# EAGLE board motherboard_alt (EAGLE 8.5.0)
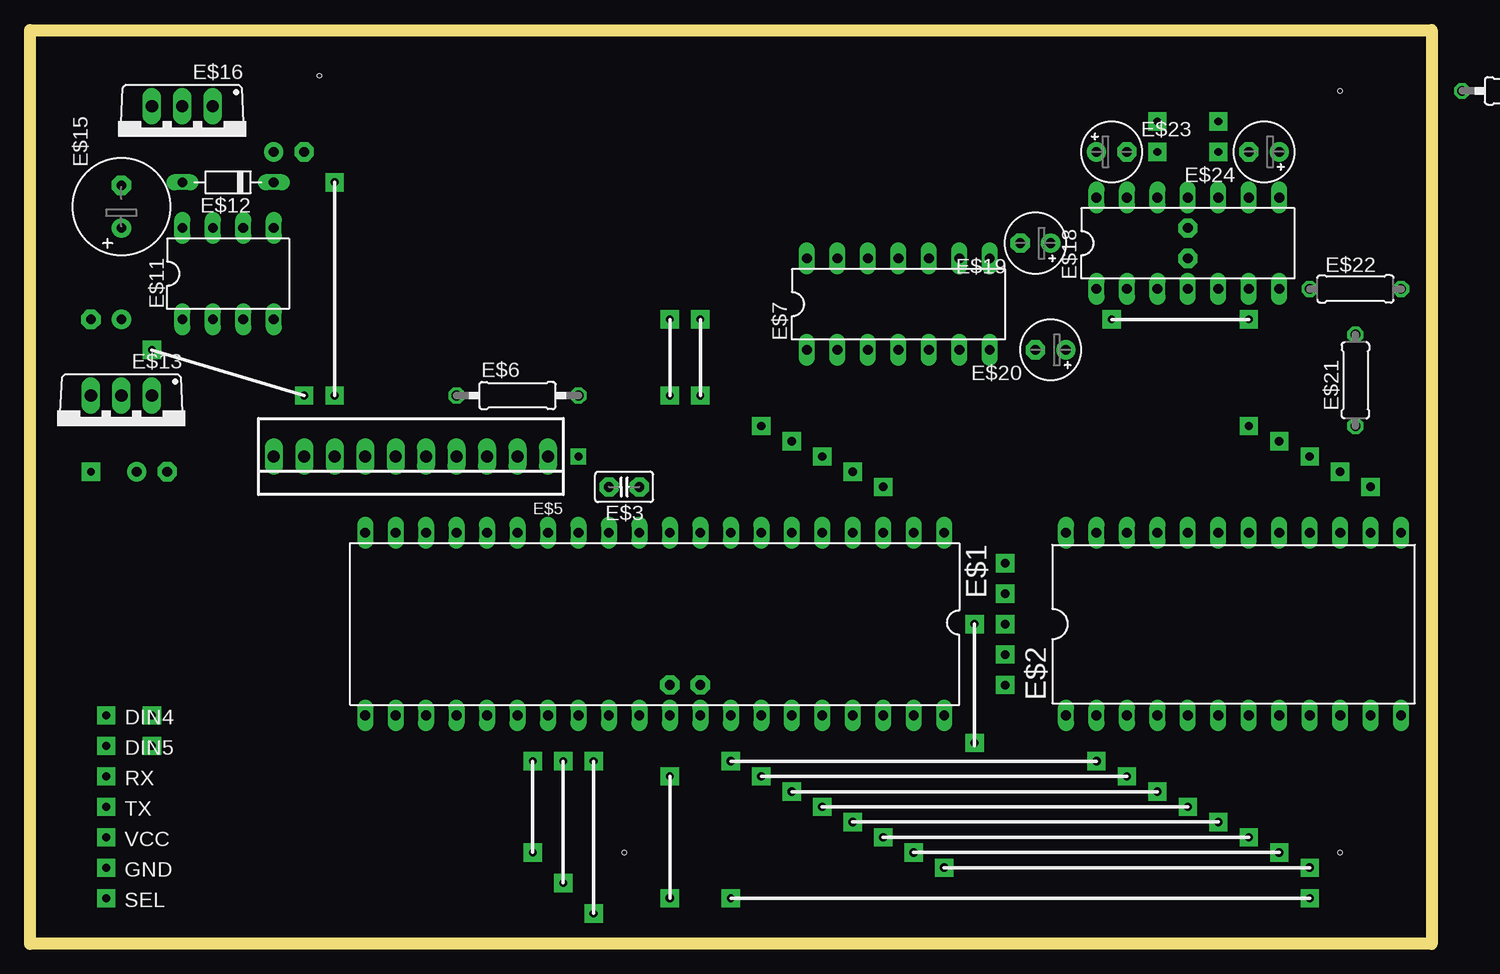
[diagram p0: board, top side]
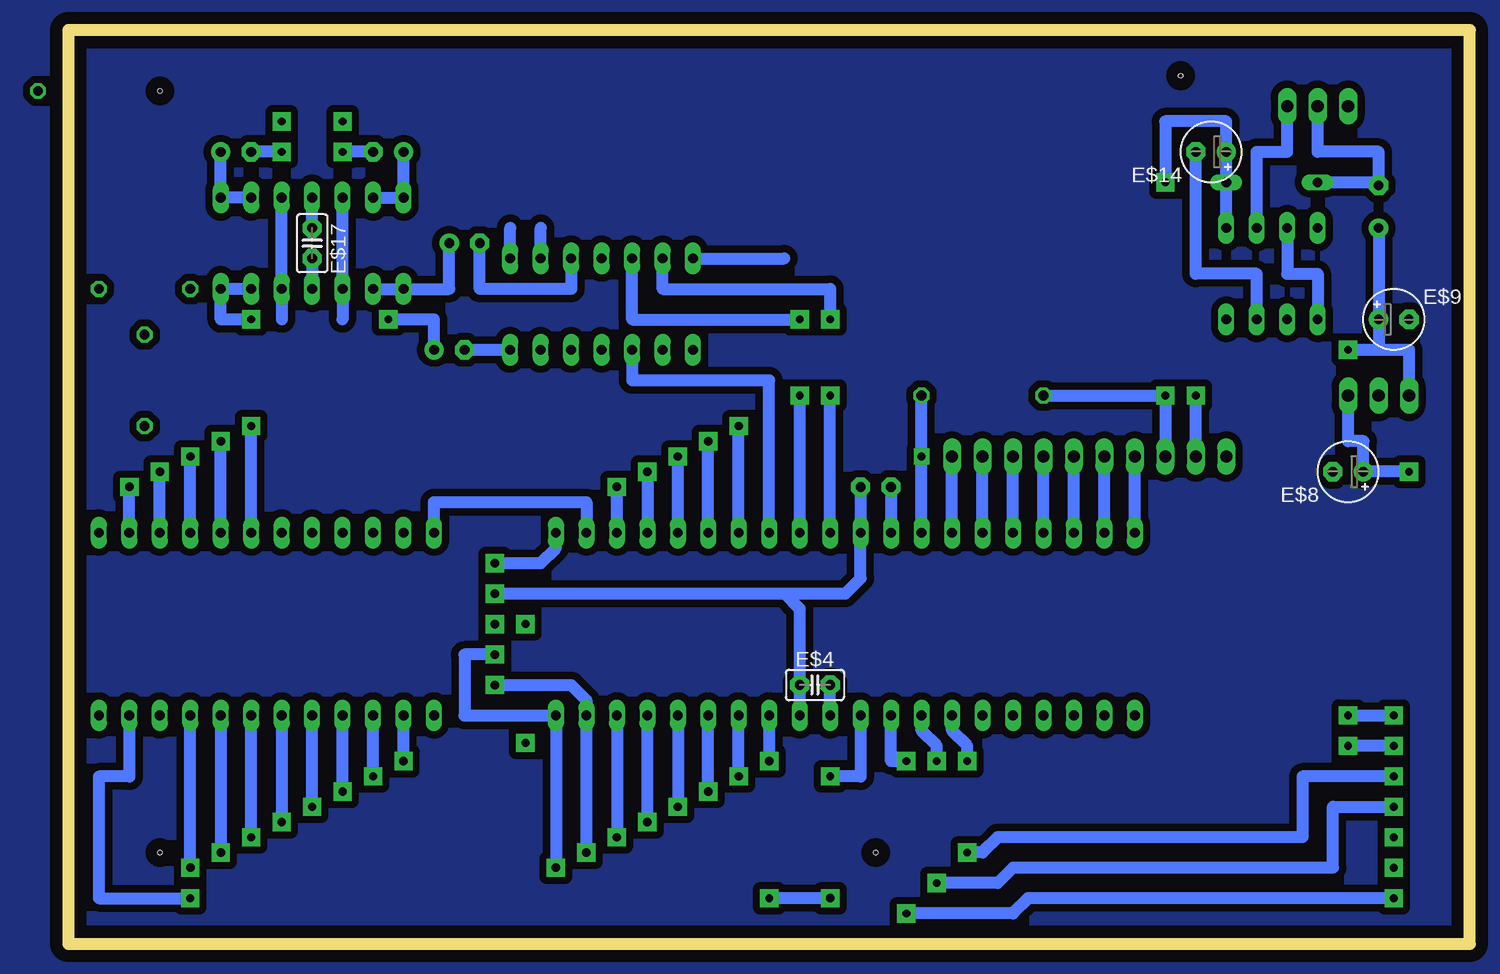
[diagram p1: board, bottom side, seen from below]

Size 116.84 x 76.2 mm. Coordinates in mm from the lower left corner, seen from the top.
Outline: 116.84,0 0,0 0,76.2 116.84,76.2 116.84,0
Copper layers (1*16): Top 0.035mm / dielectric 1.5mm / Bottom 0.035mm
Design rules "default": minimum track width 6mil, minimum drill 0.35mm, track to track 6mil, track to pad 6mil, pad to pad 6mil, via to via 6mil, smd to smd 6mil, copper to edge 40mil, drill to drill 6mil, minimum pad ring 10mil, minimum via ring 8mil, stop-mask expansion 4mil, vias tented up to drill 0mil, thermal gap 10mil
Holes 0.35 mm at 109.22,7.62 49.53,7.62 109.22,71.12 24.13,72.39

## Footprints (pad centres in the part's own frame; a part is rotated, then mirrored left to right if it is on the bottom)
DIL40 = drill 0.813 long: 1 -24.13,-7.62; 2 -21.59,-7.62; 3 -19.05,-7.62; 4 -16.51,-7.62; 5 -13.97,-7.62; 6 -11.43,-7.62; 7 -8.89,-7.62; 8 -6.35,-7.62; 9 -3.81,-7.62; 10 -1.27,-7.62; 11 1.27,-7.62; 12 3.81,-7.62; 13 6.35,-7.62; 14 8.89,-7.62; 15 11.43,-7.62; 16 13.97,-7.62; 17 16.51,-7.62; 18 19.05,-7.62; 19 21.59,-7.62; 20 24.13,-7.62; 21 24.13,7.62; 22 21.59,7.62; 23 19.05,7.62; 24 16.51,7.62; 25 13.97,7.62; 26 11.43,7.62; 27 8.89,7.62; 28 6.35,7.62; 29 3.81,7.62; 30 1.27,7.62; 31 -1.27,7.62; 32 -3.81,7.62; 33 -6.35,7.62; 34 -8.89,7.62; 35 -11.43,7.62; 36 -13.97,7.62; 37 -16.51,7.62; 38 -19.05,7.62; 39 -21.59,7.62; 40 -24.13,7.62
DIL24-6 = drill 0.813 long: 1 -13.97,-7.62; 2 -11.43,-7.62; 3 -8.89,-7.62; 4 -6.35,-7.62; 5 -3.81,-7.62; 6 -1.27,-7.62; 7 1.27,-7.62; 8 3.81,-7.62; 9 6.35,-7.62; 10 8.89,-7.62; 11 11.43,-7.62; 12 13.97,-7.62; 13 13.97,7.62; 14 11.43,7.62; 15 8.89,7.62; 16 6.35,7.62; 17 3.81,7.62; 18 1.27,7.62; 19 -1.27,7.62; 20 -3.81,7.62; 21 -6.35,7.62; 22 -8.89,7.62; 23 -11.43,7.62; 24 -13.97,7.62
C2.5-2 = drill 0.813 pad 1.6 octagon: 1 -1.27,0; 2 1.27,0
22-23-2101 = drill 1 long: 1 -11.43,0; 2 -8.89,0; 3 -6.35,0; 4 -3.81,0; 5 -1.27,0; 6 1.27,0; 7 3.81,0; 8 6.35,0; 9 8.89,0; 10 11.43,0
0207/10 = drill 0.813 octagon: 1 -5.08,0; 2 5.08,0
DIL14 = drill 0.813 long: 1 -7.62,-3.81; 2 -5.08,-3.81; 3 -2.54,-3.81; 4 0,-3.81; 5 2.54,-3.81; 6 5.08,-3.81; 7 7.62,-3.81; 8 7.62,3.81; 9 5.08,3.81; 10 2.54,3.81; 11 0,3.81; 12 -2.54,3.81; 13 -5.08,3.81; 14 -7.62,3.81
E2,5-5 = drill 0.813 pad 1.6: + -1.27,0 | drill 0.813 pad 1.6 octagon: - 1.27,0
DIL08 = drill 0.813 long: 1 -3.81,-3.81; 2 -1.27,-3.81; 3 1.27,-3.81; 4 3.81,-3.81; 5 3.81,3.81; 6 1.27,3.81; 7 -1.27,3.81; 8 -3.81,3.81
D-7.5 = drill 0.813 long: A 3.81,0; C -3.81,0
TO220V = drill 1.016 long: 1 -2.54,-2.54; 2 0,-2.54; 3 2.54,-2.54
E3,5-8 = drill 0.813 pad 1.6: + -1.778,0 | drill 0.813 pad 1.6 octagon: - 1.778,0
0207/7 = drill 0.813 octagon: 1 -3.81,0; 2 3.81,0

## Placement (x,y rotation side)
E$1  [DIL40]  52.07,26.67 180 top
E$2  [DIL24-6]  100.33,26.67 0 top
E$3  [C2.5-2]  49.53,38.1 180 top
E$4  [C2.5-2]  54.61,21.59 0 bottom
E$5  [22-23-2101]  31.75,40.64 180 top
E$6  [0207/10]  40.64,45.72 0 top
E$7  [DIL14]  72.39,53.34 0 top
E$8  [E2,5-5]  10.16,39.37 180 bottom
E$9  [E2,5-5]  6.35,52.07 0 bottom
E$10  [0207/10]  124.46,71.12 180 top
E$11  [DIL08]  16.51,55.88 0 top
E$12  [D-7.5]  16.51,63.5 180 top
E$13  [TO220V]  7.62,43.18 180 top
E$14  [E2,5-5]  21.59,66.04 180 bottom
E$15  [E3,5-8]  7.62,61.47 90 top
E$16  [TO220V]  12.7,67.31 180 top
E$17  [C2.5-2]  96.52,58.42 270 bottom
E$18  [DIL14]  96.52,58.42 0 top
E$19  [E2,5-5]  83.82,58.42 180 top
E$20  [E2,5-5]  85.09,49.53 180 top
E$21  [0207/7]  110.49,46.99 90 top
E$22  [0207/7]  110.49,54.61 0 top
E$23  [E2,5-5]  90.17,66.04 0 top
E$24  [E2,5-5]  102.87,66.04 180 top

## Library data of the parts
E$1 E$2 = ic-package
E$3 E$4 E$17 = capacitor-wima
E$5 = con-molex
E$6 E$10 E$21 E$22 = BeagleBone_Black_Wireless
E$7 E$11 E$18 = 40xx
E$8 E$9 E$14 E$15 E$19 E$20 E$23 E$24 = BeagleBone_Blue_R3
E$12 = diode
E$13 E$16 = transistor-pnp

## Nets
S$1: E$2.2
S$2: E$2.3
S$3: E$2.4
S$4: E$2.5
S$5: E$2.6
S$6: E$2.7
S$7: E$2.8
S$8: E$2.9
S$9: E$1.33
S$10: E$1.34
S$11: E$1.35
S$12: E$1.36
S$13: E$1.37
S$14: E$1.38
S$15: E$1.14 E$5.1
S$16: E$1.31 E$4.2
S$19: E$1.3
S$20: E$1.2 E$2.24
S$21: E$2.18
S$22: E$2.17
S$23: E$2.16
S$24: E$2.15
S$25: E$2.14
S$26: E$1.4
S$27: E$1.5
S$28: E$1.6
S$29: E$1.7
S$30: E$1.1
S$31: E$1.11 E$1.32 E$3.1
S$33: E$1.40
S$34: E$1.12 E$3.2
S$35: E$1.39
S$36: E$1.15 E$5.2
S$37: E$1.16 E$5.3
S$38: E$1.17 E$5.4
S$39: E$1.18 E$5.5
S$40: E$1.19 E$5.6
S$41: E$1.20 E$5.7
S$42: E$1.13 E$6.2
S$43: E$5.8 E$6.1
S$44: E$2.11
S$45: E$1.30
S$56: E$1.27
S$57: E$1.28
S$59: E$1.29
S$64: E$7.7 E$20.-
S$65: E$11.5 E$12.C
S$66: E$12.A E$15.- E$16.2
S$67: E$11.3 E$14.-
S$68: E$11.1 E$11.7
S$69: E$5.9
S$70: E$11.6 E$16.1
S$71: E$9.+ E$13.3 E$15.+
S$72: E$7.10 E$19.-
S$73: E$18.13 E$18.14 E$23.+
S$74: E$18.1 E$18.2 E$19.+
S$75: E$18.8 E$18.9 E$24.+
S$76: E$23.-
S$77: E$1.8 E$7.3
S$78: E$7.12
S$79: E$7.14
S$80: E$7.13
S$81: E$8.+ E$13.1
S$82: E$1.10
S$83: E$1.9
S$84: E$18.3 E$18.12
S$85: E$18.5 E$18.10
S$86: E$17.1 E$18.11
S$87: E$17.2 E$18.4
S$88: E$20.+
S$89: E$18.6 E$18.7
S$90: E$24.-
S$93: E$7.9
S$94: E$7.8

## Tracks (layer width: path | path; a pad name or v marks a point on that pad's centre or on a via)
S$1  (via drill 0.7 pad 1.52)
  Bottom 1.016: v88.9,15.24 E$2.2
S$2  (via drill 0.7 pad 1.52)
  Bottom 1.016: v91.44,13.97 E$2.3
S$3  (via drill 0.7 pad 1.52)
  Bottom 1.016: v93.98,12.7 E$2.4
S$4  (via drill 0.7 pad 1.52)
  Bottom 1.016: v96.52,11.43 E$2.5
S$5  (via drill 0.7 pad 1.52)
  Bottom 1.016: E$2.6 v99.06,10.16
S$6  (via drill 0.7 pad 1.52)
  Bottom 1.016: v101.6,8.89 E$2.7
S$7  (via drill 0.7 pad 1.52)
  Bottom 1.016: E$2.8 v104.14,7.62
S$8  (via drill 0.7 pad 1.52)
  Bottom 1.016: v106.68,6.35 E$2.9
S$9  (via drill 0.7 pad 1.52)
  Bottom 1.016: E$1.33 v58.42,15.24
S$10  (via drill 0.7 pad 1.52)
  Bottom 1.016: v60.96,13.97 E$1.34
S$11  (via drill 0.7 pad 1.52)
  Bottom 1.016: v63.5,12.7 E$1.35
S$12  (via drill 0.7 pad 1.52)
  Bottom 1.016: E$1.36 v66.04,11.43
S$13  (via drill 0.7 pad 1.52)
  Bottom 1.016: v68.58,10.16 E$1.37
S$14  (via drill 0.7 pad 1.52)
  Bottom 1.016: E$1.38 v71.12,8.89
S$15
  Bottom 1.016: E$1.14 E$5.1
S$16
  Bottom 1.016: E$1.31 E$4.2
S$19  (via drill 0.7 pad 1.52)
  Bottom 1.016: E$1.3 v71.12,38.1
S$20
  Bottom 1.016: E$2.24 86.36,36.83 73.66,36.83 E$1.2
S$21  (via drill 0.7 pad 1.52)
  Bottom 1.016: E$2.18 v101.6,43.18
S$22  (via drill 0.7 pad 1.52)
  Bottom 1.016: E$2.17 v104.14,41.91
S$23  (via drill 0.7 pad 1.52)
  Bottom 1.016: E$2.16 v106.68,40.64
S$24  (via drill 0.7 pad 1.52)
  Bottom 1.016: E$2.15 v109.22,39.37
S$25  (via drill 0.7 pad 1.52)
  Bottom 1.016: E$2.14 v111.76,38.1
S$26  (via drill 0.7 pad 1.52)
  Bottom 1.016: v68.58,39.37 E$1.4
S$27  (via drill 0.7 pad 1.52)
  Bottom 1.016: E$1.5 v66.04,40.64
S$28  (via drill 0.7 pad 1.52)
  Bottom 1.016: E$1.6 v63.5,41.91
S$29  (via drill 0.7 pad 1.52)
  Bottom 1.016: E$1.7 v60.96,43.18
S$30  (via drill 0.7 pad 1.52)
  Bottom 1.016: v81.28,31.75 77.47,31.75 76.2,33.02 E$1.1
S$31  (via drill 0.7 pad 1.52)
  Bottom 1.016: v81.28,29.21 57.15,29.21 | 57.15,29.21 55.88,27.94 E$1.32 | 57.15,29.21 52.07,29.21 50.8,30.48 E$1.11 E$3.1
S$32  (via drill 0.7 pad 1.52)
  other vias: 81.28,26.67
S$33  (via drill 0.7 pad 1.52)
  Bottom 1.016: v81.28,24.13 83.82,24.13 83.82,19.05 E$1.40 v76.2,6.35
S$34
  Bottom 1.016: E$3.2 E$1.12
S$35  (via drill 0.7 pad 1.52)
  Bottom 1.016: v81.28,21.59 74.93,21.59 73.66,20.32 E$1.39 v73.66,7.62
S$36
  Bottom 1.016: E$1.15 E$5.2
S$37
  Bottom 1.016: E$1.16 E$5.3
S$38
  Bottom 1.016: E$1.17 E$5.4
S$39
  Bottom 1.016: E$1.18 E$5.5
S$40
  Bottom 1.016: E$1.19 E$5.6
S$41
  Bottom 1.016: E$1.20 E$5.7
S$42  (via drill 0.65 pad 1.3)
  Bottom 1.016: E$1.13 v45.72,40.64 E$6.2
S$43  (via drill 0.65 pad 1.52)
  Bottom 1.016: E$6.1 v25.4,45.72 E$5.8
S$44  (via drill 0.65 pad 1.52)
  Bottom 1.016: E$2.11 111.76,13.97 114.3,13.97 114.3,3.81 v106.68,3.81
S$45  (via drill 0.65 pad 1.52)
  Bottom 1.016: E$1.30 50.8,13.97 v53.34,13.97
S$46  (via drill 0.65 pad 1.52)
  other vias: 6.35,6.35
S$47  (via drill 0.65 pad 1.52)
  Bottom 1.016: v6.35,3.81 36.83,3.81 38.1,2.54 v46.99,2.54
S$49  (via drill 0.65 pad 1.52)
  Bottom 1.016: v6.35,16.51 v10.16,16.51
S$50  (via drill 0.65 pad 1.52)
  other vias: 6.35,8.89
S$52  (via drill 0.65 pad 1.52)
  Bottom 1.016: v10.16,19.05 v6.35,19.05
S$53  (via drill 0.65 pad 1.52)
  Bottom 1.016: v6.35,11.43 11.43,11.43 11.43,6.35 38.1,6.35 39.37,5.08 v44.45,5.08
S$55  (via drill 0.65 pad 1.52, 0.7 pad 1.52)
  Bottom 1.016: v53.34,3.81 v58.42,3.81
S$56  (via drill 0.65 pad 1.52)
  Bottom 1.016: v41.91,15.24 41.91,16.51 43.18,17.78 E$1.27
S$57  (via drill 0.65 pad 1.52)
  Bottom 1.016: v44.45,15.24 44.45,16.51 45.72,17.78 E$1.28
S$58  (via drill 0.65 pad 1.52)
  Bottom 1.016: v6.35,13.97 13.97,13.97 13.97,8.89 39.37,8.89 40.64,7.62 v41.91,7.62
S$59  (via drill 0.65 pad 1.52)
  Bottom 1.016: v46.99,15.24 48.26,15.24 E$1.29
S$60  (via drill 0.65 pad 1.52)
  other vias: 78.74,26.67
S$61  (via drill 0.65 pad 1.52)
  other vias: 78.74,16.76
S$63
  pour Bottom (isolate 0.61): -8.89,82.55 -8.89,-7.62 130.81,-7.62 130.81,82.55
S$64
  Bottom 1.016: E$7.7 E$20.-
S$65  (via drill 0.65 pad 1.52)
  Bottom 1.016: E$11.5 E$12.C 20.32,68.58 25.4,68.58 v25.4,63.5
S$66
  Bottom 1.016: E$12.A 7.62,63.5 | 7.62,63.5 E$15.- | 7.62,63.5 7.62,66.04 12.7,66.04 E$16.2
S$67
  Bottom 1.016: E$11.3 17.78,55.88 22.86,55.88 E$14.-
S$68
  Bottom 1.016: E$11.7 15.24,55.88 12.7,55.88 E$11.1
S$69  (via drill 0.65 pad 1.52)
  Bottom 1.016: E$5.9 v22.86,45.72
S$70
  Bottom 1.016: E$11.6 17.78,66.04 15.24,66.04 E$16.1
S$71  (via drill 0.65 pad 1.52)
  Bottom 1.016: E$15.+ E$9.+ 7.62,49.53 | E$13.3 5.08,49.53 7.62,49.53 | 7.62,49.53 v10.16,49.53
S$72
  Bottom 1.016: E$7.10 74.93,54.61 82.55,54.61 E$19.-
S$73
  Bottom 1.016: E$18.13 E$18.14 E$23.+
S$74
  Bottom 1.016: E$18.2 E$18.1 85.09,54.61 E$19.+
S$75
  Bottom 1.016: E$18.9 E$18.8 E$24.+
S$76  (via drill 0.65 pad 1.52)
  Bottom 1.016: E$23.- v93.98,66.04
S$77
  Bottom 1.016: E$7.3 69.85,46.99 58.42,46.99 E$1.8
S$78  (via drill 0.65 pad 1.52)
  Bottom 1.016: v55.88,52.07 69.85,52.07 E$7.12
S$79
  Bottom 1.016: E$7.14 57.15,57.15
S$80  (via drill 0.65 pad 1.52)
  Bottom 1.016: v53.34,52.07 53.34,54.61 67.31,54.61 E$7.13
S$81  (via drill 0.65 pad 1.52)
  Bottom 1.016: v5.08,39.37 E$8.+ 8.89,41.91 10.16,41.91 E$13.1
S$82  (via drill 0.65 pad 1.52)
  Bottom 1.016: E$1.10 v53.34,45.72
S$83  (via drill 0.65 pad 1.52)
  Bottom 1.016: v55.88,45.72 E$1.9
S$84
  Bottom 1.016: E$18.12 E$18.3 93.98,52.07
S$85
  Bottom 1.016: E$18.10 E$18.5 99.06,52.07
S$86
  Bottom 1.016: E$17.1 E$18.11
S$87
  Bottom 1.016: E$17.2 E$18.4
S$88  (via drill 0.65 pad 1.52)
  Bottom 1.016: E$20.+ 86.36,52.07 v90.17,52.07
S$89  (via drill 0.65 pad 1.52)
  Bottom 1.016: E$18.6 E$18.7 104.14,52.07 v101.6,52.07
S$90  (via drill 0.65 pad 1.52)
  Bottom 1.016: v99.06,66.04 E$24.-
S$91  (via drill 0.65 pad 1.52)
  other vias: 93.98,68.58
S$92  (via drill 0.65 pad 1.52)
  other vias: 99.06,68.58
S$93
  Bottom 1.016: E$7.9 77.47,59.69
S$94
  Bottom 1.016: E$7.8 80.01,59.69

## Text on the board
tPlace: DIN4 | DIN5 | RX | TX | VCC | GND | SEL